# EAGLE board komparator 8 (EAGLE 5.06)
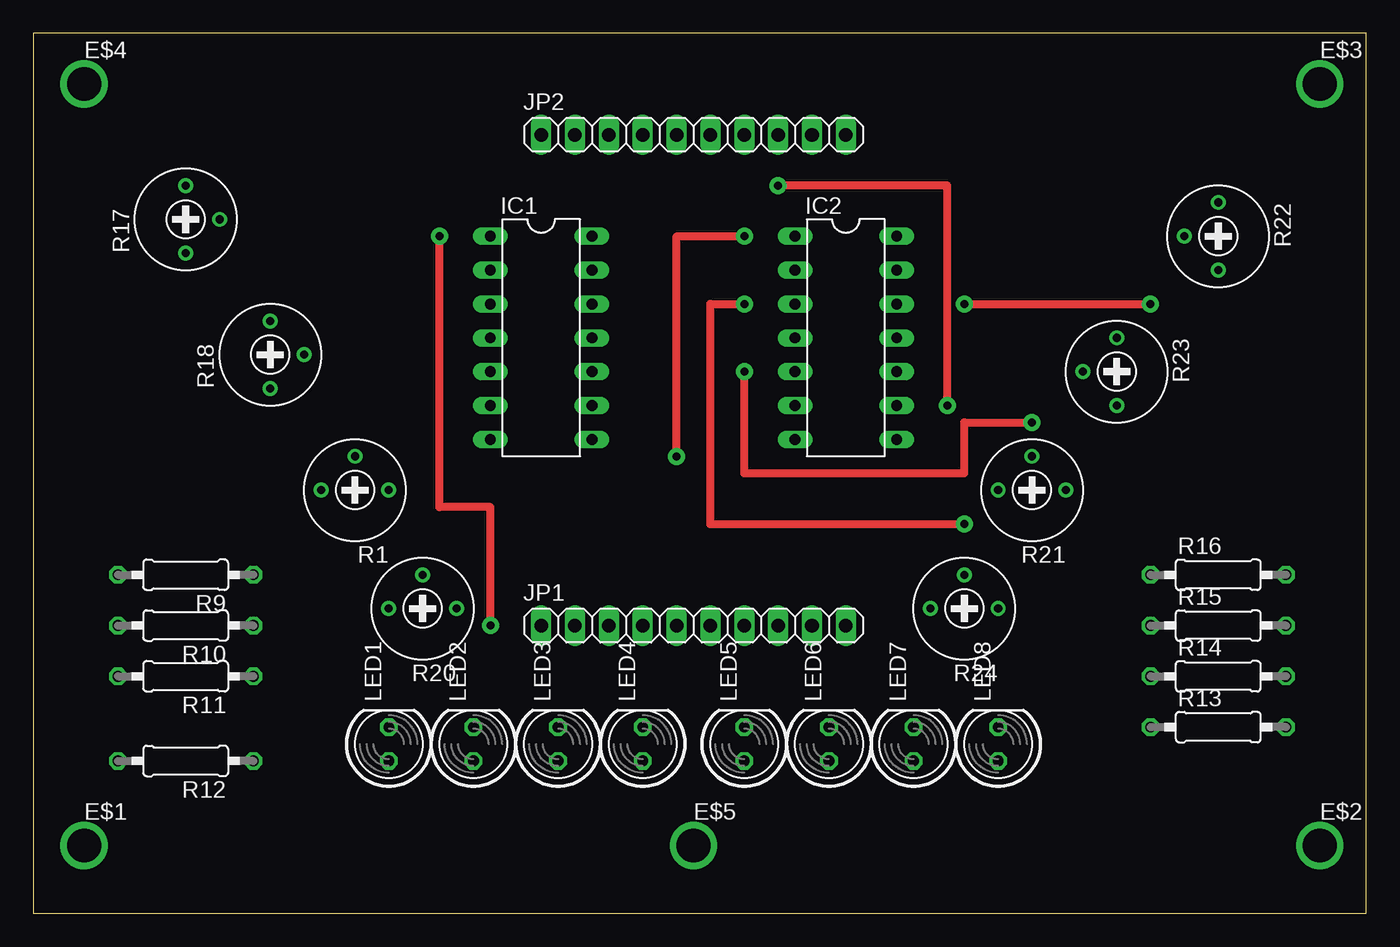
[diagram p0: board, top side]
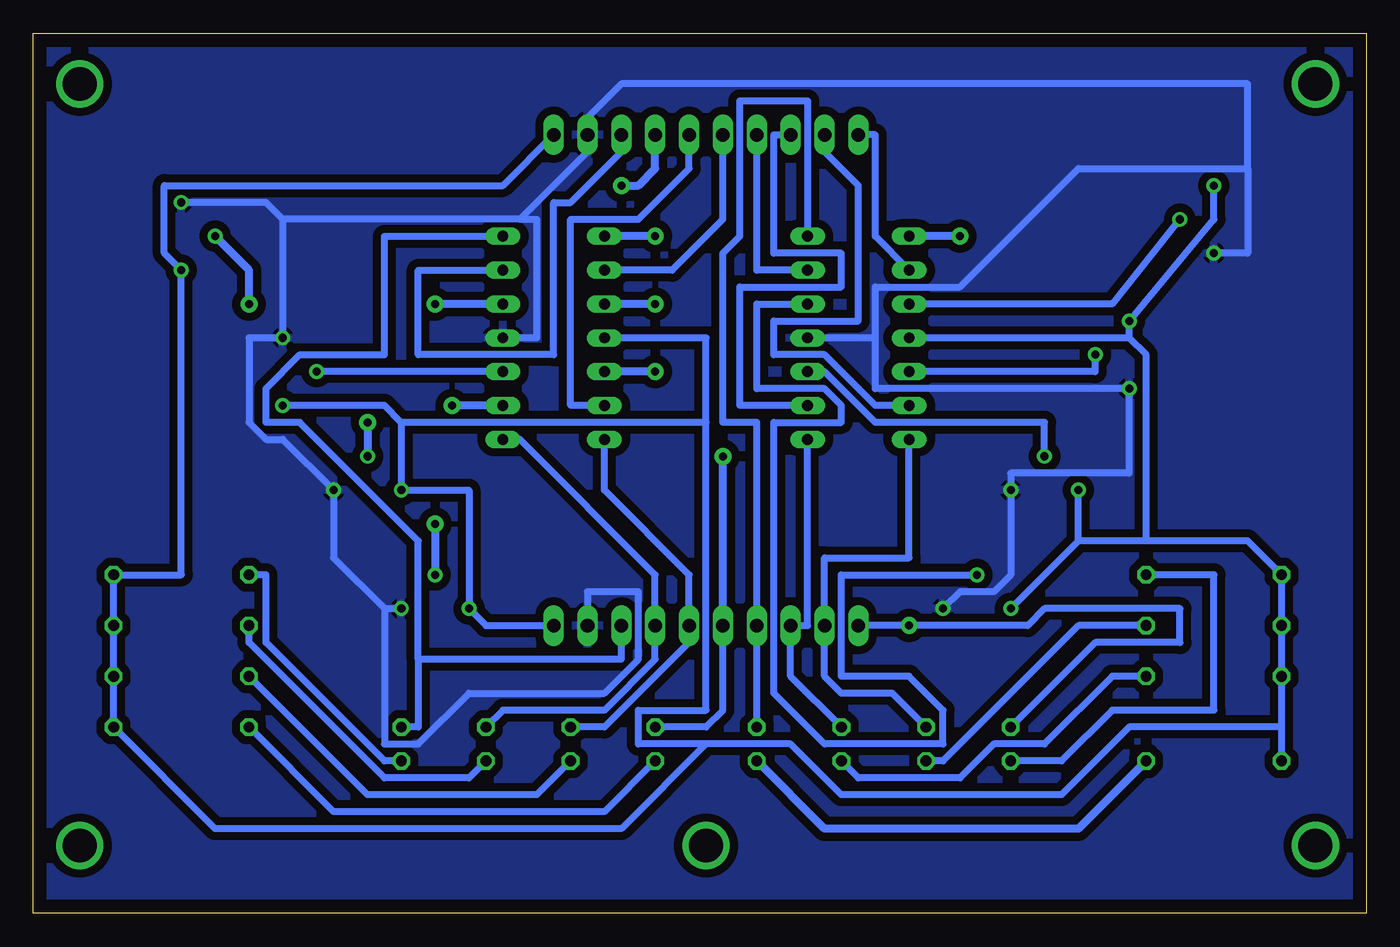
[diagram p1: board, bottom side, seen from below]

Size 100 x 66.03 mm. Coordinates in mm from the lower left corner, seen from the top.
Outline: 0,0 100,0 100,66.03 0,66.03 0,0
Copper layers (1*16): Top 0.035mm / dielectric 1.5mm / Bottom 0.035mm
Design rules "default *": minimum track width 20mil, minimum drill 24mil, track to track 10mil, track to pad 10mil, pad to pad 10mil, via to via 10mil, smd to smd 8mil, copper to edge 40mil, drill to drill 8mil, minimum pad ring 10mil, minimum via ring 8mil, stop-mask expansion 4mil, vias tented up to drill 0mil, thermal gap 10mil

## Footprints (pad centres in the part's own frame; a part is rotated, then mirrored left to right if it is on the bottom)
PAD_0.1000 = drill 2.54 pad 2.54 round: 1 0,0
DIL14 = drill 0.813 long: 1 -7.62,-3.81; 2 -5.08,-3.81; 3 -2.54,-3.81; 4 0,-3.81; 5 2.54,-3.81; 6 5.08,-3.81; 7 7.62,-3.81; 8 7.62,3.81; 9 5.08,3.81; 10 2.54,3.81; 11 0,3.81; 12 -2.54,3.81; 13 -5.08,3.81; 14 -7.62,3.81
1X10 = drill 1.016 long: 1 -11.43,0; 2 -8.89,0; 3 -6.35,0; 4 -3.81,0; 5 -1.27,0; 6 1.27,0; 7 3.81,0; 8 6.35,0; 9 8.89,0; 10 11.43,0
LED5MM = drill 0.813 octagon: A -1.27,0; K 1.27,0
RTRIM3339P = drill 0.61 round: 1 -2.54,0; 2 0,-2.54; 3 2.54,0
0207/10 = drill 0.813 octagon: 1 -5.08,0; 2 5.08,0

## Placement (x,y rotation side)
E$1  [PAD_0.1000]  3.81,5.08 0 top
E$2  [PAD_0.1000]  96.52,5.08 0 top
E$3  [PAD_0.1000]  96.52,62.23 0 top
E$4  [PAD_0.1000]  3.81,62.23 0 top
E$5  [PAD_0.1000]  49.53,5.08 0 top
IC1  [DIL14]  38.1,43.18 270 top
IC2  [DIL14]  60.96,43.18 270 top
JP1  [1X10]  49.53,21.59 0 top
JP2  [1X10]  49.53,58.42 0 top
LED1  [LED5MM]  26.67,12.7 90 top
LED2  [LED5MM]  33.02,12.7 90 top
LED3  [LED5MM]  39.37,12.7 90 top
LED4  [LED5MM]  45.72,12.7 90 top
LED5  [LED5MM]  53.34,12.7 90 top
LED6  [LED5MM]  59.69,12.7 90 top
LED7  [LED5MM]  66.04,12.7 90 top
LED8  [LED5MM]  72.39,12.7 90 top
R1  [RTRIM3339P]  24.13,31.75 180 top
R9  [0207/10]  11.43,25.4 180 top
R10  [0207/10]  11.43,21.59 180 top
R11  [0207/10]  11.43,17.78 180 top
R12  [0207/10]  11.43,11.43 180 top
R13  [0207/10]  88.9,13.97 0 top
R14  [0207/10]  88.9,17.78 0 top
R15  [0207/10]  88.9,21.59 0 top
R16  [0207/10]  88.9,25.4 0 top
R17  [RTRIM3339P]  11.43,52.07 90 top
R18  [RTRIM3339P]  17.78,41.91 90 top
R20  [RTRIM3339P]  29.21,22.86 180 top
R21  [RTRIM3339P]  74.93,31.75 180 top
R22  [RTRIM3339P]  88.9,50.8 270 top
R23  [RTRIM3339P]  81.28,40.64 270 top
R24  [RTRIM3339P]  69.85,22.86 180 top

## Library data of the parts
E$1-E$5 = special-drill
IC1 IC2 = ic-package
JP1 JP2 = pinhead
LED1-LED8 = led
R1 R9-R18 R20-R24 = resistor

## Nets
GND: IC1.11 IC2.11 JP1.9 JP2.9 R1.1 R17.1 R18.1 R20.1 R21.1 R22.1 R23.1 R24.1
N$1: IC1.2 JP2.1
N$2: IC1.6 JP2.2
N$3: IC1.9 JP2.3
N$4: IC1.13 JP2.4
N$5: IC2.2 JP2.5
N$6: IC2.6 JP2.6
N$7: IC2.9 JP2.7
N$8: IC2.13 JP2.8
N$10: IC1.3 R17.2
N$11: IC1.1 JP1.1 LED1.K
N$14: IC1.5 R18.2
N$15: IC1.7 JP1.2 LED2.K
N$16: IC1.8 JP1.3 LED3.K
N$17: IC1.10 R1.2
N$19: IC1.14 JP1.4 LED4.K
N$20: IC1.12 R20.2
N$23: IC2.3 R24.2
N$24: IC2.1 JP1.5 LED5.K
N$26: IC2.5 R21.2
N$27: IC2.7 JP1.6 LED6.K
N$28: IC2.8 JP1.7 LED7.K
N$29: IC2.10 R23.2
N$32: IC2.12 R22.2
N$33: IC2.14 JP1.8 LED8.K
N$34: LED1.A R9.1
N$35: LED2.A R10.1
N$36: LED3.A R11.1
N$37: LED4.A R12.1
N$38: LED5.A R13.1
N$39: LED6.A R14.1
N$40: LED7.A R15.1
N$41: LED8.A R16.1
N$43: IC1.4 IC2.4 JP1.10 JP2.10 R1.3 R9.2 R10.2 R11.2 R12.2 R13.2 R14.2 R15.2 R16.2 R17.3 R18.3 R20.3 R21.3 R22.3 R23.3 R24.3

## Tracks (layer width: path | path; a pad name or v marks a point on that pad's centre or on a via)
GND
  Bottom 0.508: R20.1 30.48,24.13 27.94,24.13 26.67,25.4 R1.1 26.67,33.02 17.78,33.02 R18.1 36.83,39.37 36.83,43.18 | 8.89,55.88 21.59,55.88 30.48,46.99 36.83,46.99 36.83,43.18 | 36.83,43.18 IC1.11 | 73.66,22.86 77.47,26.67 R21.1 81.28,35.56 82.55,35.56 83.82,36.83 83.82,43.18 R23.1 81.28,52.07 | JP1.9 58.42,24.13 54.61,24.13 54.61,19.05 57.15,16.51 67.31,16.51 71.12,12.7 73.66,12.7 73.66,22.86 | 73.66,22.86 R24.1 | 81.28,52.07 82.55,53.34 R22.1 | IC2.11 62.23,43.18 62.23,52.07 63.5,52.07 | 63.5,52.07 81.28,52.07 | 63.5,52.07 58.42,57.15 JP2.9 58.42,59.69 55.88,62.23 8.89,62.23 8.89,55.88 | R17.1 8.89,49.53 8.89,55.88
  pour Bottom (isolate 0.61): 0,66.04 100.33,66.04 100.33,1.27 0,1.27
N$1
  Bottom 0.508: IC1.2 36.83,50.8 36.83,58.42 JP2.1
N$2
  Bottom 0.508: IC1.6 36.83,38.1 40.64,41.91 44.45,41.91 44.45,44.45 38.1,44.45 38.1,54.61 40.64,57.15 JP2.2
N$3
  Bottom 0.508: IC1.9 46.99,38.1 46.99,46.99 39.37,46.99 39.37,49.53 44.45,49.53 44.45,58.42 JP2.3
N$4
  Bottom 0.508: IC1.13 45.72,48.26 JP2.4
N$5
  Bottom 0.508: IC2.2 52.07,48.26 48.26,52.07 JP2.5
N$6
  Bottom 0.508: IC2.6 59.69,38.1 59.69,52.07 54.61,52.07 50.8,55.88 JP2.6
N$7  (via drill 0.6 pad 1.27)
  Top 0.61: v55.88,54.61 68.58,54.61 v68.58,38.1
  Bottom 0.61: JP2.7 53.34,55.88 54.61,54.61 v55.88,54.61 | IC2.9 v68.58,38.1 IC2.9
N$8
  Bottom 0.508: IC2.13 71.12,48.26 71.12,41.91 60.96,41.91 60.96,53.34 59.69,53.34 55.88,57.15 JP2.8
N$10
  Bottom 0.508: R17.2 19.05,45.72 IC1.3
N$11  (via drill 0.6 pad 1.27)
  Top 0.61: v30.48,50.8 30.48,30.48 34.29,30.48 v34.29,21.59
  Bottom 0.508: LED1.K 20.32,20.32 13.97,20.32 13.97,22.86 24.13,22.86 25.4,21.59 v34.29,21.59 JP1.1
  Bottom 0.61: v30.48,50.8 IC1.1 | v30.48,50.8 IC1.1 | v30.48,50.8 IC1.1 | v30.48,50.8 IC1.1
N$14
  Bottom 0.508: R18.2 20.32,40.64 IC1.5
N$15
  Bottom 0.508: LED2.K 35.56,16.51 39.37,16.51 40.64,17.78 JP1.2 40.64,26.67 34.29,26.67 IC1.7
N$16
  Bottom 0.508: LED3.K 43.18,17.78 JP1.3 41.91,21.59 IC1.8
N$17
  Bottom 0.508: R1.2 24.13,36.83 36.83,36.83 40.64,40.64 IC1.10
N$19
  Bottom 0.508: LED4.K JP1.4 45.72,36.83 48.26,36.83 48.26,49.53 46.99,50.8 46.99,60.96 41.91,60.96 IC1.14
N$20
  Bottom 0.508: R20.2 39.37,25.4 39.37,17.78 34.29,17.78 31.75,15.24 31.75,12.7 40.64,12.7 44.45,16.51 44.45,36.83 39.37,36.83 39.37,38.1 40.64,39.37 45.72,39.37 45.72,45.72 IC1.12
N$23  (via drill 0.6 pad 1.27)
  Top 0.61: v69.85,29.21 50.8,29.21 50.8,45.72 v53.34,45.72
  Bottom 0.61: v53.34,45.72 IC2.3 v53.34,45.72 | v69.85,29.21 R24.2 v69.85,29.21
N$24  (via drill 0.6 pad 1.27)
  Top 0.61: v53.34,50.8 48.26,50.8 v48.26,34.29
  Bottom 0.508: LED5.K 49.53,13.97 48.26,15.24 JP1.5
  Bottom 0.61: JP1.5 v48.26,34.29 JP1.5 | v53.34,50.8 IC2.1 v53.34,50.8
N$26  (via drill 0.6 pad 1.27)
  Top 0.61: v53.34,40.64 53.34,33.02 69.85,33.02 69.85,36.83 v74.93,36.83
  Bottom 0.61: v53.34,40.64 IC2.5 v53.34,40.64 | v74.93,36.83 R21.2 v74.93,36.83
N$27
  Bottom 0.508: LED6.K 57.15,13.97 50.8,20.32 JP1.6 50.8,25.4 57.15,31.75 IC2.7
N$28
  Bottom 0.508: IC2.8 63.5,35.56 53.34,25.4 JP1.7 53.34,19.05 57.15,15.24 64.77,15.24 LED7.K
N$29
  Bottom 0.508: IC2.10 R23.2
N$32  (via drill 0.6 pad 1.27)
  Top 0.61: v69.85,45.72 v83.82,45.72
  Bottom 0.61: R22.2 83.82,48.26 v83.82,45.72 | IC2.12 v69.85,45.72 IC2.12
N$33
  Bottom 0.508: IC2.14 73.66,50.8 73.66,41.91 80.01,41.91 82.55,39.37 82.55,36.83 80.01,36.83 71.12,27.94 71.12,19.05 | 71.12,19.05 71.12,13.97 LED8.K | JP1.8 55.88,19.05 71.12,19.05
N$34
  Bottom 0.508: R9.1 11.43,25.4 11.43,15.24 19.05,15.24 22.86,11.43 LED1.A
N$35
  Bottom 0.508: LED2.A 31.75,11.43 21.59,21.59 R10.1
N$36
  Bottom 0.508: LED3.A 38.1,10.16 30.48,10.16 27.94,12.7 24.13,12.7 19.05,17.78 R11.1
N$37
  Bottom 0.61: LED4.A 40.64,6.35 21.59,6.35 R12.1
N$38
  Bottom 0.508: LED5.A 57.15,7.62 77.47,7.62 R13.1
N$39
  Bottom 0.508: LED6.A 62.23,8.89 74.93,8.89 R14.1
N$40
  Bottom 0.508: LED7.A 67.31,10.16 73.66,10.16 83.82,20.32 R15.1
N$41
  Bottom 0.508: LED8.A 73.66,11.43 82.55,20.32 82.55,25.4 R16.1
N$43
  Bottom 0.508: JP2.10 64.77,54.61 90.17,54.61 90.17,49.53 R22.3 88.9,25.4 R16.2 R15.2 R14.2 R13.2 86.36,6.35 55.88,6.35 49.53,12.7 | JP1.10 66.04,21.59 R24.3 67.31,31.75 R21.3 72.39,36.83 | R23.3 73.66,38.1 72.39,36.83 | 49.53,36.83 72.39,36.83 | 17.78,43.18 IC1.4 | R17.3 11.43,52.07 R18.3 17.78,43.18 | 6.35,13.97 R11.2 R10.2 R9.2 8.89,27.94 16.51,27.94 | 21.59,27.94 R20.3 | 21.59,27.94 R1.3 | 16.51,27.94 21.59,27.94 | 17.78,43.18 16.51,41.91 16.51,27.94 | 49.53,36.83 49.53,43.18 IC2.4 | 49.53,36.83 49.53,15.24 54.61,15.24 54.61,12.7 49.53,12.7 | 49.53,12.7 43.18,12.7 39.37,8.89 22.86,8.89 17.78,13.97 6.35,13.97 | R12.2 6.35,13.97